# Altium PCB Motor_Driver_r1.1.PcbDoc
Units mil, origin at the board's own origin, x right, y up, seen from the top; angles counter-clockwise.
Board outline 1524 x 1263.81 mil, 2 copper layers (Top Layer, Bottom Layer); 25 components, 20 nets, 70 pads, 18 vias.
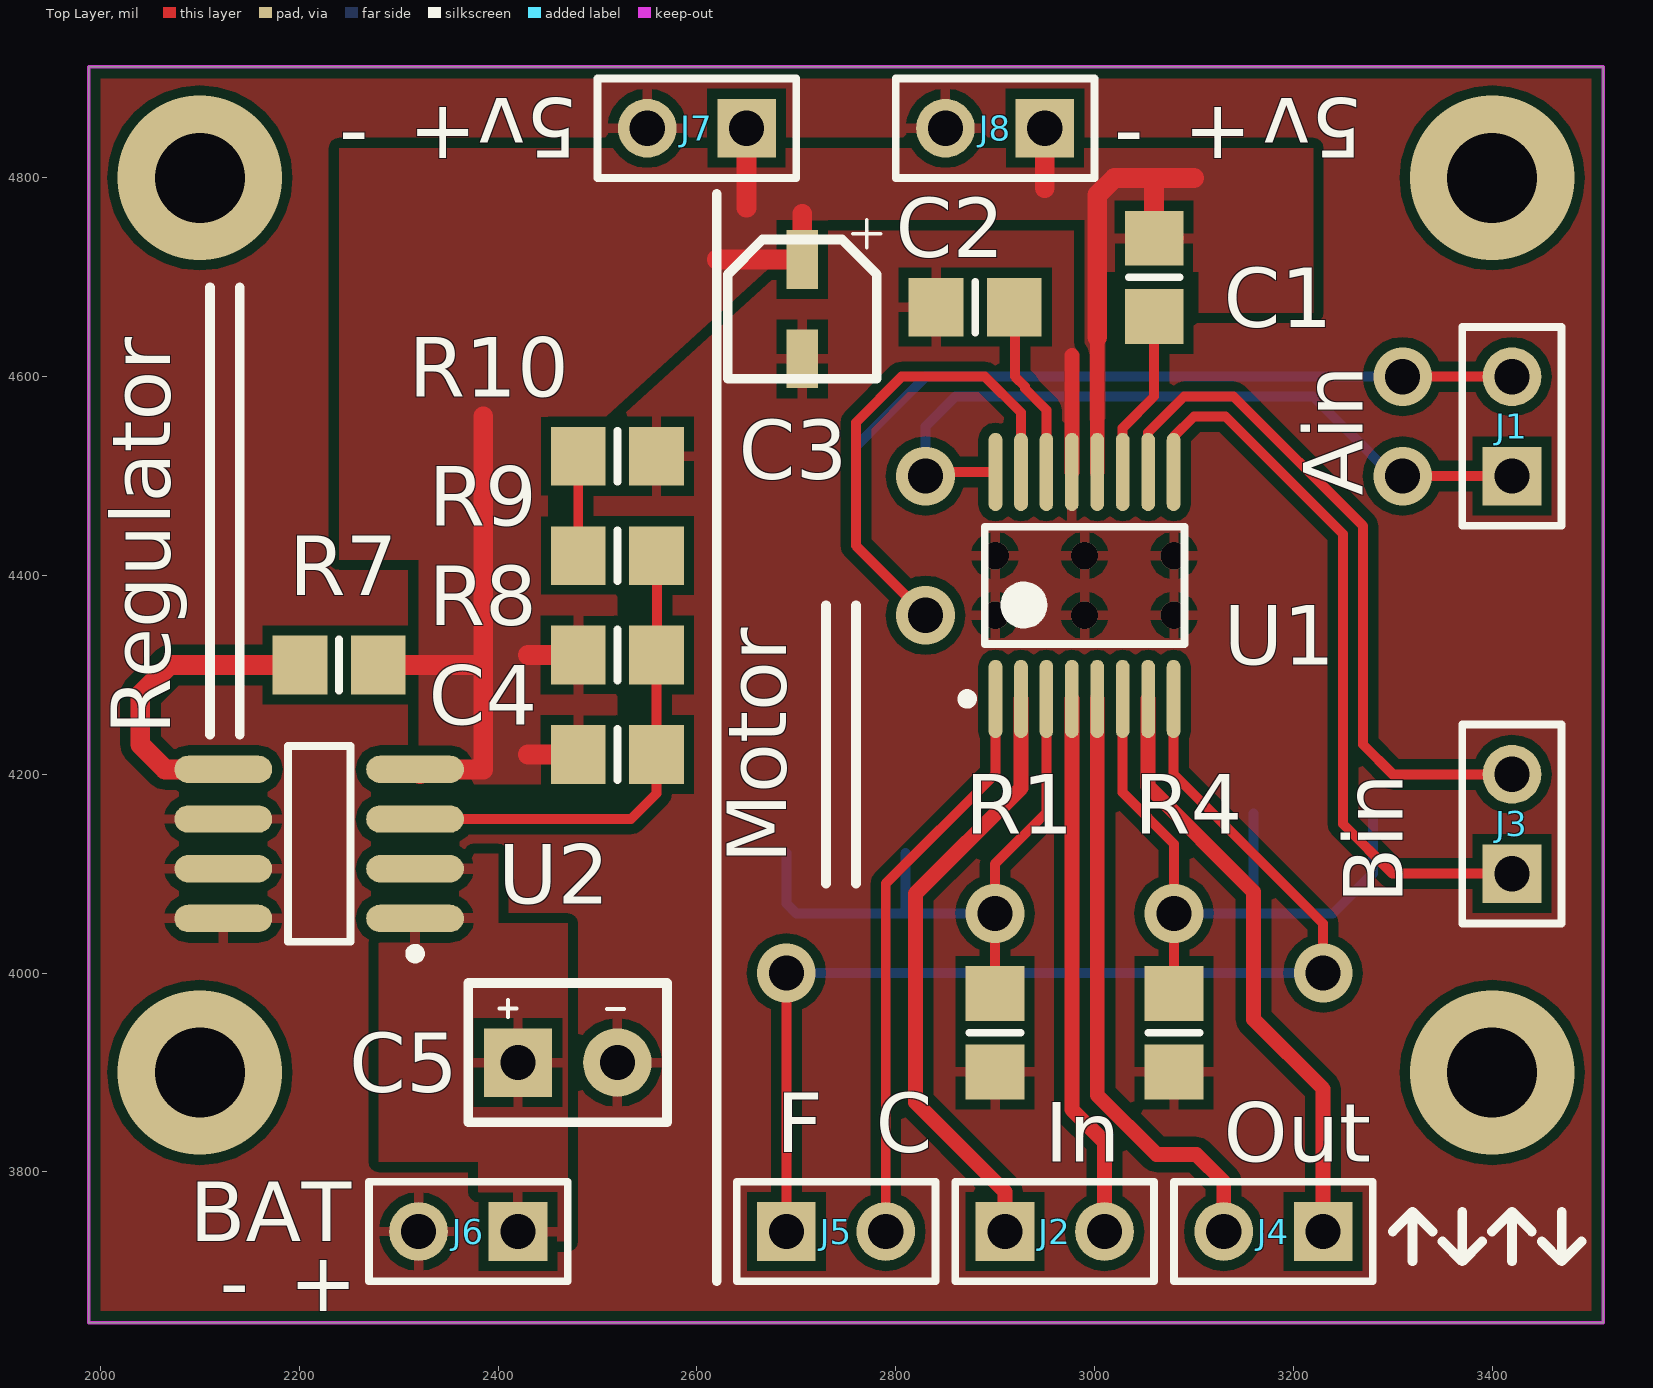
[diagram p0: Top Layer view]
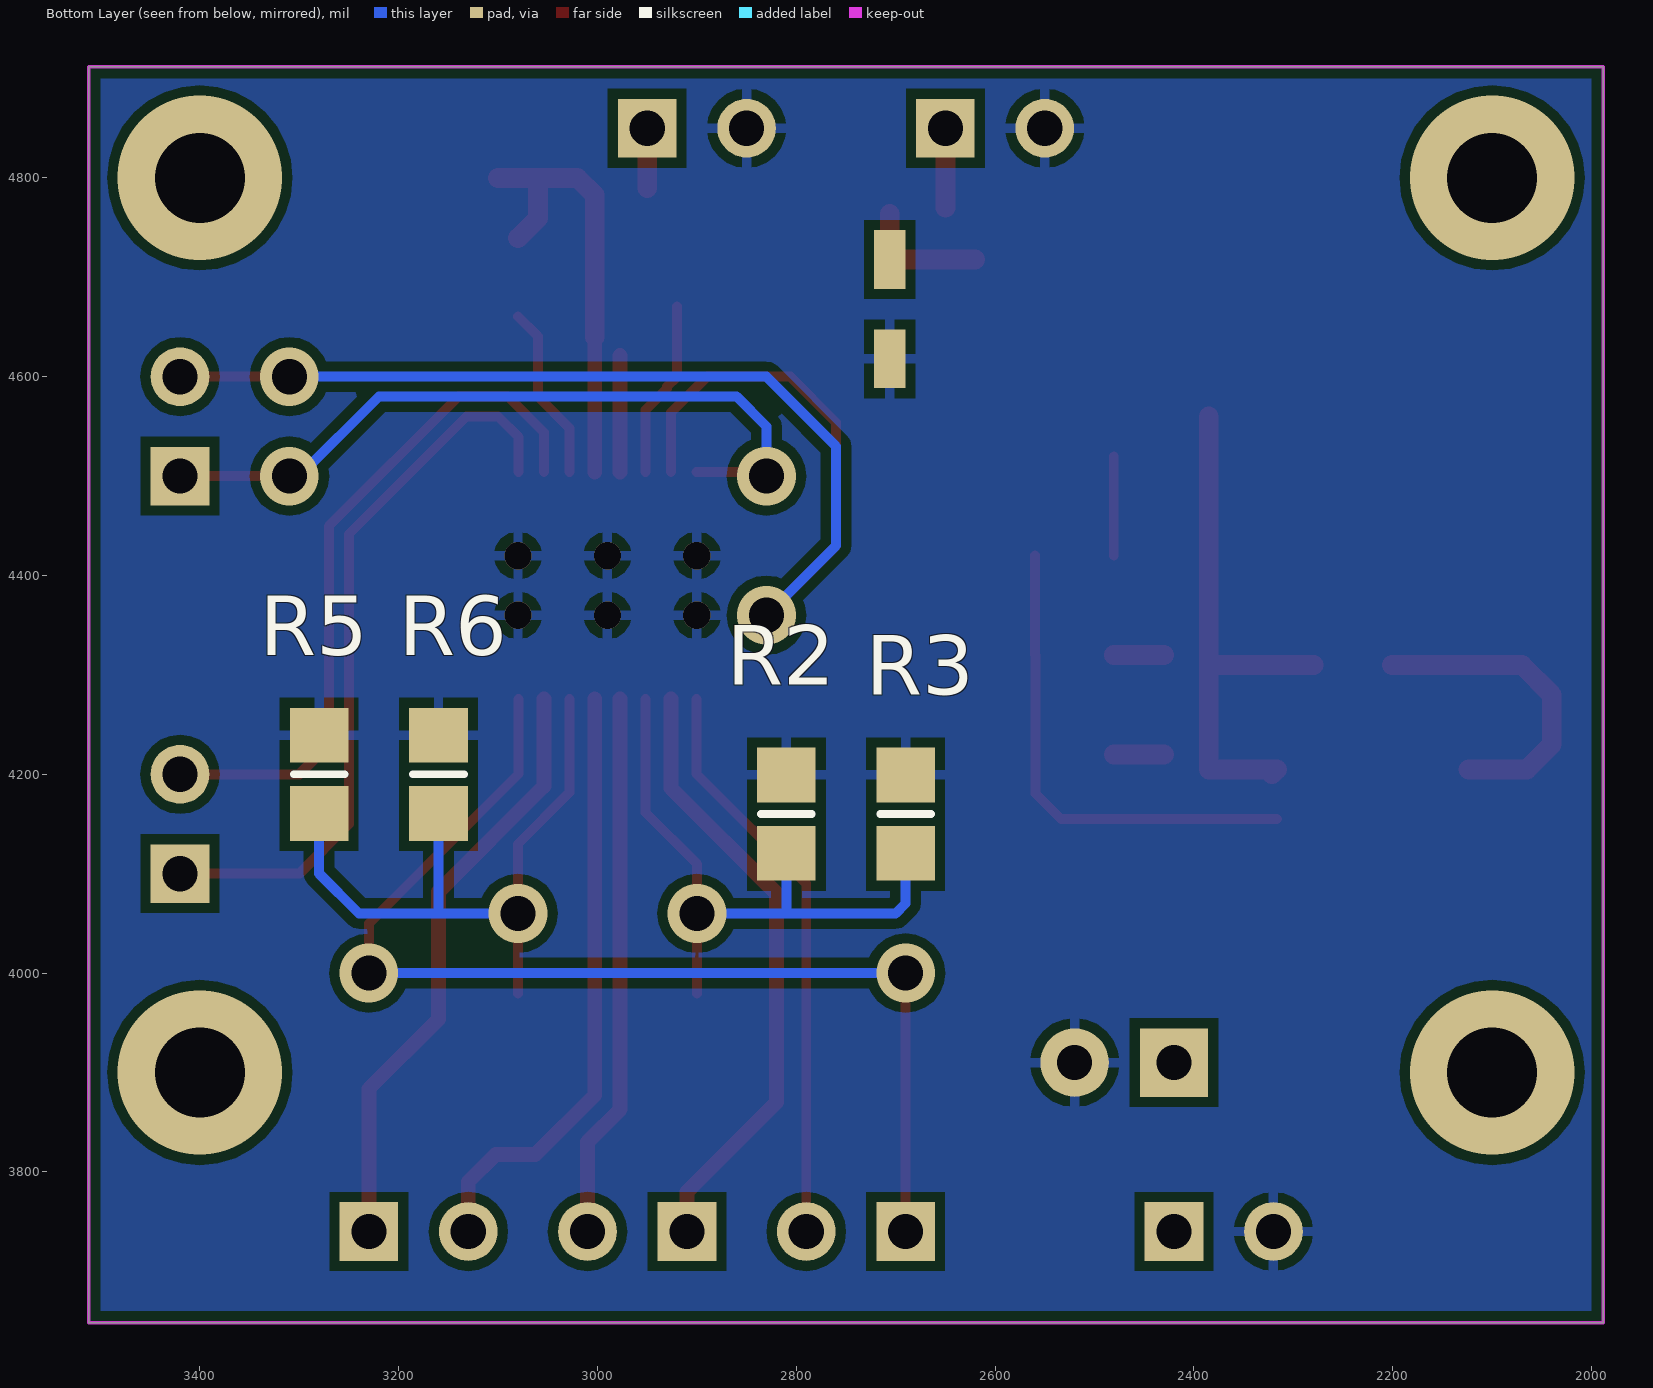
[diagram p1: Bottom Layer view, seen from below]

## Layer stack, top to bottom
Top Layer: signal copper 1.4
Dielectric: dielectric 12.6, FR-4, Dk 4.8
Bottom Layer: signal copper 1.4

## Board outline
3512,4912 1988,4912 1988,3648.19 3512,3648.19

## Design rules (kind name [scope] priority, off if disabled: settings)
Clearance [All] p1: gap=10
PolygonConnect [All] p1: connectstyle=Relief reliefconductorwidth=10 reliefentries=4 polygonreliefangle="90 Angle" airgapwidth=10
RoutingVias [All] p1: holewidth=28 width=50 viastyle="Through Hole" minholewidth=28 minwidth=50 maxholewidth=28 maxwidth=50
SolderMaskExpansion [All] p1: expansion=4
Width [All] p1: maxlimit=20 minlimit=10 preferedwidth=10
28 further rules are at their usual default settings.

## Components (designator, comment, footprint, x,y, rotation, side; value= is the part's Value field where it differs from the comment)
C1 "10pF cap" 6-0805_M 3060,4700 r90 top
C2 "2.2uF cap" 6-0805_M 2880,4670 r0 top
C3 "" "CAP SMD" 2706,4668 r0 top
C4 "100pF Cap" 6-0805_M 2520,4220 r180 top
C5 "47uF Electrolytic" capacitor_tantalum 2420,3910 r0 top
J1 "Header 2" HDR1X2 3420,4500 r90 top
J2 "Header 2" HDR1X2 2910,3740 r0 top
J3 "Header 2" HDR1X2 3420,4100 r90 top
J4 "Header 2" HDR1X2 3230,3740 r180 top
J5 "Header 2" HDR1X2 2690,3740 r0 top
J6 "Header 2" HDR1X2 2420,3740 r180 top
J7 "Header 2" HDR1X2 2650,4850 r180 top
J8 "Header 2" HDR1X2 2950,4850 r180 top
R1 "100m" 6-0805_M 2900,3940 r90 top
R2 "200m" 6-0805_M 2810,4160 r270 bottom
R3 "1" 6-0805_M 2690,4160 r270 bottom
R4 "100m" 6-0805_M 3080,3940 r90 top
R5 "200m" 6-0805_M 3280,4200 r270 bottom
R6 "1" 6-0805_M 3160,4200 r270 bottom
R7 "1% 100k" 6-0805_M 2240,4310 r0 top
R8 "1% 10k" 6-0805_M 2520,4320 r180 top
R9 "1% 1.15k" 6-0805_M 2520,4420 r0 top
R10 "1% 2k" 6-0805_M 2520,4520 r180 top
U1 "DRV8833PWR" TI-PW16_M 2990,4390 r90 top
U2 "L6933H1.2" SO8_M 2220,4130 r180 top

## Footprints (in the part's own frame and the unit in brackets; to place one, negate y for a bottom-side part, rotate by r counter-clockwise, add the part's x,y. Pads: shape width x height; smd on the part's side, far side on the other; paste and mask are expansions set on the pad)
6-0805_M [mm] "Chip Resistor, Body 2.0x1.2mm, IPC Low Density"
  rect 1.4x1.5 smd: 1(-1,0) 2(1,0)
  silkscreen extent 0,-0.65 0,0.65, body extent -1.07,-0.7 1.07,0.7, height 0.7
"CAP SMD" [mm] "SMD cap"
  rect 0.8x1.5 all layers, no hole: 0(0,1.27) 1(0,-1.27)
  silkscreen extent -1.91,-1.78 2.01,2.29, body extent -1.49,-1.5 1.5,1.5, height 5.4
capacitor_tantalum [mm] "3d model"
  rect 1.75x1.75 hole 0.9: 1(0,0)
  round 1.75 hole 0.9: 2(2.54,0)
  silkscreen extent -1.27,-1.52 3.81,2.03, body extent -0.99,-1.42 3.56,1.67, height 5.25
HDR1X2 [mm] "Connector; Header; 2 Position"
  rect 1.5x1.5 hole 0.9: 1(0,0)
  round 1.5 hole 0.9: 2(2.54,0)
  silkscreen extent -1.27,-1.27 3.81,1.27
SO8_M [mm] "SOIC, 8-Leads, Body 4.9x3.9mm, Pitch 1.27mm, IPC Low Density"
  oval 2.5x0.7 smd: 1(-2.45,1.905) 2(-2.45,0.635) 3(-2.45,-0.635) 4(-2.45,-1.905) 5(2.45,-1.905) 6(2.45,-0.635) 7(2.45,0.635) 8(2.45,1.905)
  silkscreen extent -2.58,-2.5 0.8,2.93, body extent -2,-2.5 2,2.5, height 1.75
TI-PW16_M [mm] "SOP, 16-Leads, Body 5x4.4mm, Pitch 0.65mm, IPC Low Density"
  oval 2x0.35 smd: 1(-2.9,2.275) 2(-2.9,1.625) 3(-2.9,0.975) 4(-2.9,0.325) 5(-2.9,-0.325) 6(-2.9,-0.975) 7(-2.9,-1.625) 8(-2.9,-2.275) 9(2.9,-2.275) 10(2.9,-1.625) 11(2.9,-0.975) 12(2.9,-0.325) 13(2.9,0.325) 14(2.9,0.975) 15(2.9,1.625) 16(2.9,2.275)
  silkscreen extent -3.02,-2.55 1.5,3.12, body extent -2.25,-2.55 2.25,2.55, height 1.2

## Part data
C1 C2: library part cap, "Capacitor"
C4: library part Cap, "Capacitor"
C5: library part "Cap Pol1", "Polarized Capacitor (Radial)"
J1 J2 J3 J4 J5 J6 J7 J8: "Header, 2-Pin"
R1 R2 R3 R4 R5 R6 R7 R8 R9 R10: library part Res1, "Resistor"
U1: library part CMP-1529-00001-1, "2 A Low Voltage Dual Brushed DC or Single Bipolar Stepper Motor Driver (PWM Ctrl), 2.7 to 10.8 V, -40 to 85 degC, 16-Pin SOP (PW), Green (RoHS & no Sb/Br), Tape and Reel"
U2: library part CMP-0240-00057-1, "High Performance 2A ULDO Linear Regulator with Soft Start, 8-Pin SO"

## Via types
v1: diameter 59.06, hole 35.43, Top Layer to Bottom Layer, 8 vias
v2: diameter 27.56, hole 27.56, Top Layer to Bottom Layer, 6 vias
v3: diameter 165.35, hole 90.55, Top Layer to Bottom Layer, 4 vias

## Nets (pads, with @x,y where several pads share a name; then routed paths per layer and width w, separated by ;. In a path a pad name is that pad's centre, name@x,y a point inside that pad or via, vN(x,y) a via of type N, cw(c..) or ccw(c..) an arc to the next point about the centre after c; other vN are vias at no path point)
5V: C1.2 C3.0 C4.2 J7.1 J8.1 R7.2 R8.2 U1.12 U2.4 | length 1361.4
  Top Layer w15: U1.12 3002.8,4640
  Top Layer w20: R7.2 2385,4310 ; U2.4@2321.46,4200 U2.4 2385,4205 2385,4560 ; 2430,4220 C4.2 ; 2430,4320 R8.2 ; 2620,4718 C3.0 2706,4764 ; 2650,4770 J7.1 ; 2950,4790 J8.1 ; 3002.8,4640 3002.8,4782.8 3020,4800 3060,4800 ; C1.2@3080,4739.37 3060,4759.37 3060,4800 ; 3100,4800 3060,4800
AIN1: J1.1 U1.16 | length 756
  Top Layer w10: v1@2830,4504.17 U1.16 ; v1(3310,4500) J1.1
  Bottom Layer w10: v1(2830,4500) 2830,4550 2860,4580 3220,4580 3300,4500 v1(3310,4500)
AIN2: J1.2 U1.15 | length 1370.8
  Top Layer w10: v1(2830,4360) 2760,4430 2760,4554 2806,4600 2890,4600 2926.02,4563.98 U1.15 ; v1(3310,4600) J1.2
  Bottom Layer w10: v1(2830,4360) 2760,4430 2760,4530 2830,4600 v1(3310,4600)
AOUT1: J2.1 U1.2 | length 617
  Top Layer w15: J2.1 2910,3780 2820,3870 2820,4080 2926.02,4186.02 U1.2
AOUT2: J2.2 U1.4 | length 519.4
  Top Layer w15: U1.4 2977.2,3862.8 3010,3830 3010,3770
BIN1: J3.1 U1.9 | length 725.7
  Top Layer w10: U1.9 3079.57,4539.57 3100,4560 3131.72,4560 3250,4441.72 3250,4150 3300,4100 J3.1@3400,4100
BIN2: J3.2 U1.10 | length 687
  Top Layer w10: U1.10 3053.98,4543.98 3090,4580 3140,4580 3270,4450 3270,4230 3300,4200 J3.2@3400,4200
BOUT1: J4.1 U1.7 | length 608.7
  Top Layer w15: U1.7 3053.98,4187.84 3160,4081.82 3160,3953.49 3230,3883.49 J4.1
BOUT2: J4.2 U1.5 | length 601.9
  Top Layer w15: U1.5 3002.8,3877.2 3062.5,3817.5 3102.5,3817.5 3130,3790 J4.2@3130,3750
CONTROL: J5.2 U1.1 | length 581.6
  Top Layer w10: J5.2 2790,4090 2900.43,4200.43 U1.1
FAULT: J5.1 U1.8 | length 1138.1
  Top Layer w10: J5.1 v1(2690,4000) ; U1.8 3079.57,4200.43 3230,4050 v1(3230,4000)
  Bottom Layer w10: v1(2690,4000) v1(3230,4000)
GND: C2.1 C3.1 C5.2 J6.2 J7.2 J8.2 R1.1 R2.1 R3.1 R4.1 R5.1 R6.1 R10.1 U1.13 U2.6 U2.7 U2.8 | length 117.2
  Top Layer w15: U1.13 2977.2,4621.41
  other v2: 2900,4360 2990,4360 3080,4360 2900,4420 2990,4420 3080,4420
NetC1_1: C1.1 U1.11 | length 177.8
  Top Layer w10: U1.11 3028.39,4548.39 3060,4580 3060,4640.63 C1.1@3080,4660.63
NetC4_1: C4.1 R8.1 R9.2 U2.3 | length 492.3
  Top Layer w10: U2.3 2533.74,4155 2559.37,4180.63 C4.1 R8.1 ; R8.1@2560,4320.63 R9.2@2560,4420
NetR7_1: R7.1 U2.5 | length 317
  Top Layer w20: U2.5 2065,4205 2040,4230 2040,4280 2070,4310 R7.1
NetR9_1: R9.1 R10.2 | length 100
  Top Layer w10: R9.1 R10.2
SENSE1: R1.2 R2.2 R3.2 U1.3 | length 643.2
  Top Layer w10: R1.2 v1(2900,4060) 2900,4110 2951.61,4161.61 U1.3
  Bottom Layer w10: R3.2 2690,4070 2700,4060 2810,4060 ; R2.2 2810,4060 ; v1(2900,4060) 2810,4060
SENSE2: R4.2 R5.2 R6.2 U1.6 | length 695.7
  Top Layer w10: U1.6 3028.39,4181.61 3080,4130 v1(3080,4060) R4.2
  Bottom Layer w10: v1(3080,4060) 3240,4060 3280,4100 R5.2 ; 3160,4060 R6.2
VBATTERY: C5.1 J6.1 U2.1 U2.2
VINT: C2.2 U1.14 | length 179.6
  Top Layer w10: C2.2@2920,4670.63 2920,4600 2930,4590 2930,4588.28 2951.61,4566.67 U1.14
copper on no net:
  other v3: 2100,3900 3400,3900 2100,4800 3400,4800

## Polygon pours and split planes (outlines as drawn)
GND on Bottom Layer "GND" (solid, remove dead copper, pour order 63): 3500,3660 3500,4900 2000,4900 2000,3660
GND on Top Layer "GND" (solid, remove dead copper, pour order 61): 3500,3660 3500,4900 2000,4900 2000,3660
5V on Top Layer "5v" (solid, remove dead copper, pour order 59): 2988.57,4830 2440,4830 2440,4560 2508.57,4560 2725.71,4757.31 3000,4757.31 3000,4830
5V on Top Layer "5v" (solid, remove dead copper, pour order 53): 2320,4190 2520,4190 2520,4428.43 2520,4440.98 2450,4440.98 2450,4641.76 2450,4666.86 2510,4666.86 2510,4830 2240,4830 2240,4415.88 2320,4415.88 2320,4190
VBATTERY on Top Layer "VBattery" (solid, remove dead copper, pour order 13): 2470,3730 2470,4050 2400,4050 2400,4120 2280,4120 2280,3810 2380,3810 2380,3730 2470,3730
5V on Top Layer "5v" (solid, remove dead copper, pour order 6): 3220,4830 3220,4664.29 3105,4664.29 3105,4705.71 3010.91,4705.71 3010.91,4581.43 3010.91,4557.82 2992.92,4540 2990,4542.9 2990,4830 3220,4830

## Keep-outs
Keep-Out Layer:
  the board outline again, w3.54

## Silkscreen, mask and mechanical layers (free items; w line width, h text height)
Top Overlay:
  lines w9.84: 2110,4240 2110,4690 ; 2140,4240 2140,4690 ; 2620,3690 2620,4784 ; 2730,4090 2730,4370 ; 2760,4090 2760,4370 ; 3300,3740 3320,3760 ; 3320,3710 3320,3760 ; 3340,3740 3320,3760 ; 3350,3730 3370,3710 ; 3370,3760 3370,3710 ; 3390,3730 3370,3710 ; 3400,3740 3420,3760 ; 3420,3710 3420,3760 ; 3440,3740 3420,3760 ; 3450,3730 3470,3710 ; 3470,3760 3470,3710 ; 3490,3730 3470,3710
  text "5v" at 2480,4880 h60 r180
  text "5v" at 3270,4880 h60 r180
  text "-" at 2240,4820 h60
  text "+" at 2310,4820 h60
  text "-" at 3020,4820 h60
  text "+" at 3090,4820 h60
  text "Ain" at 3270,4480 h60 r90
  text "Regulator" at 2070,4240 h60 r90
  text "Motor" at 2690,4110 h60 r90
  text "Bin" at 3310,4070 h60 r90
  text "F" at 2680,3820 h60
  text "C" at 2780,3820 h60
  text "In" at 2950,3810 h60
  text "Out" at 3130,3810 h60
  text "BAT" at 2090,3730 h60
  text "-" at 2120,3660 h60
  text "+" at 2190,3660 h60